# Altium PCB do_an.PcbDoc
Units mm, origin at the board's own origin, x right, y up, seen from the top; angles counter-clockwise.
Board outline 42.54 x 28.44 mm, 2 copper layers (Top Layer, Bottom Layer); 27 components, 14 nets, 69 pads, 0 vias.
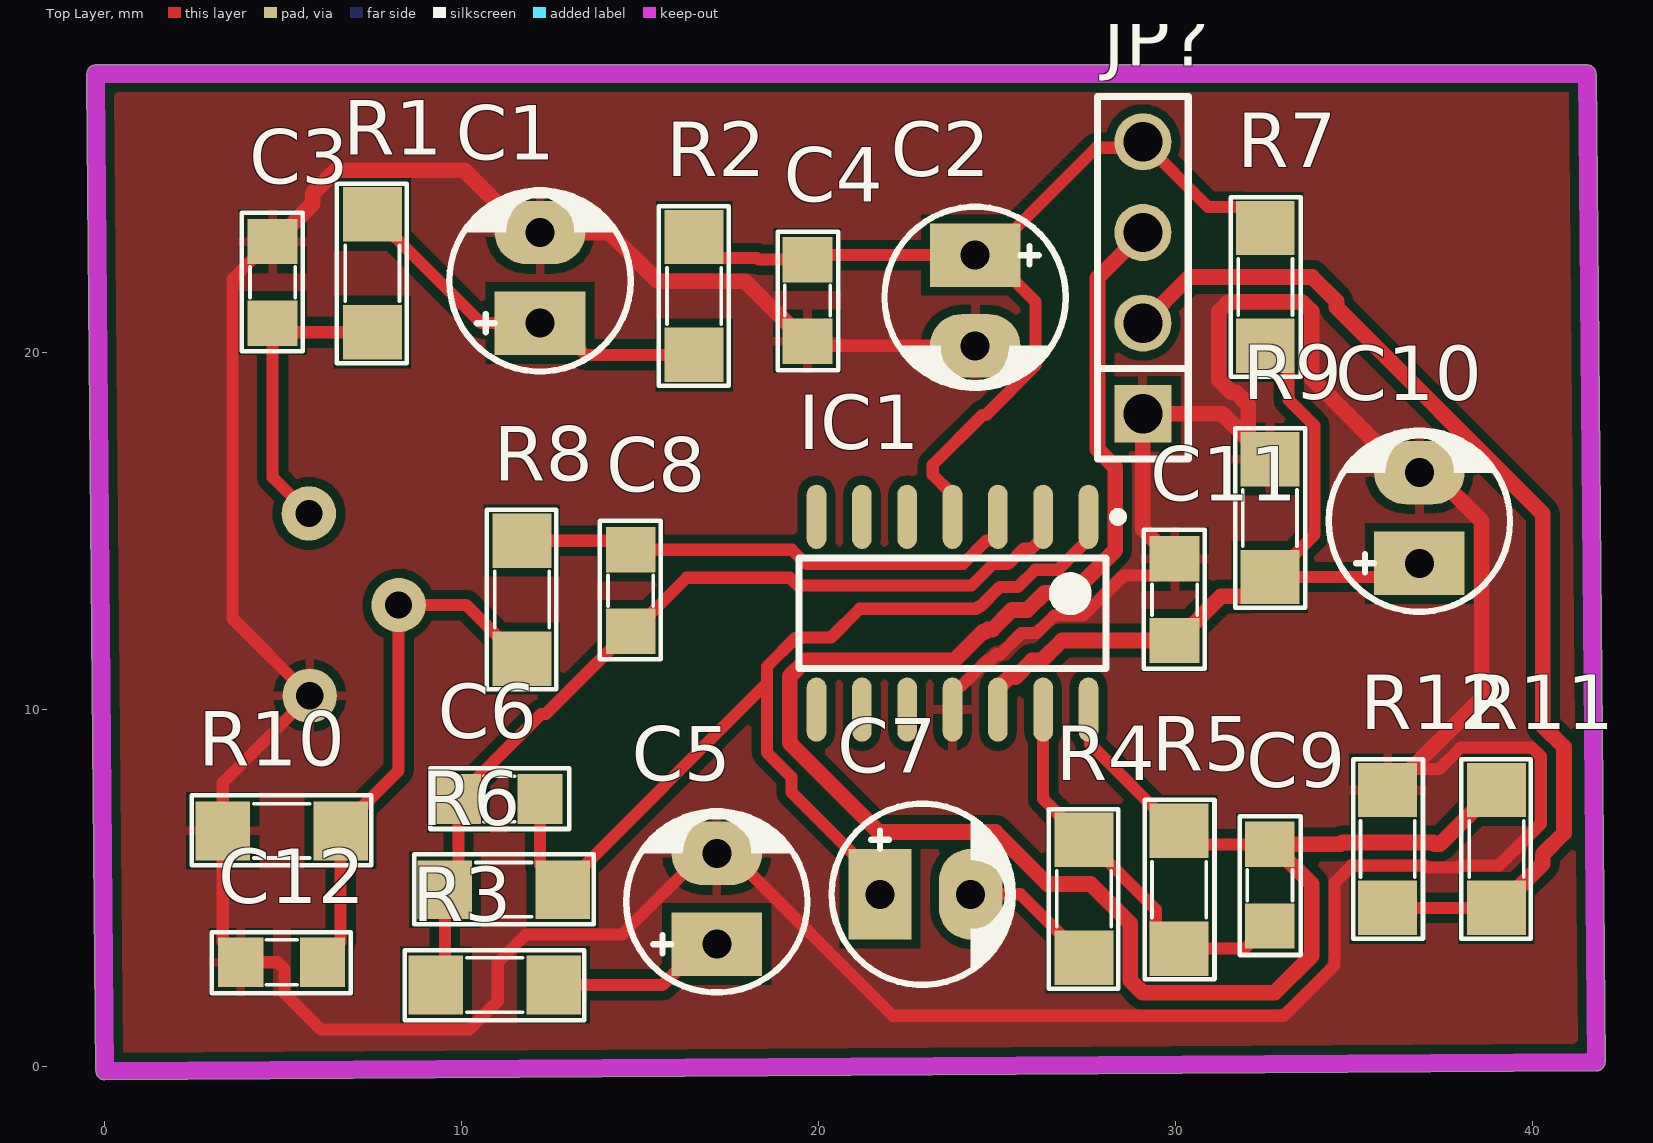
[diagram p0: Top Layer view]
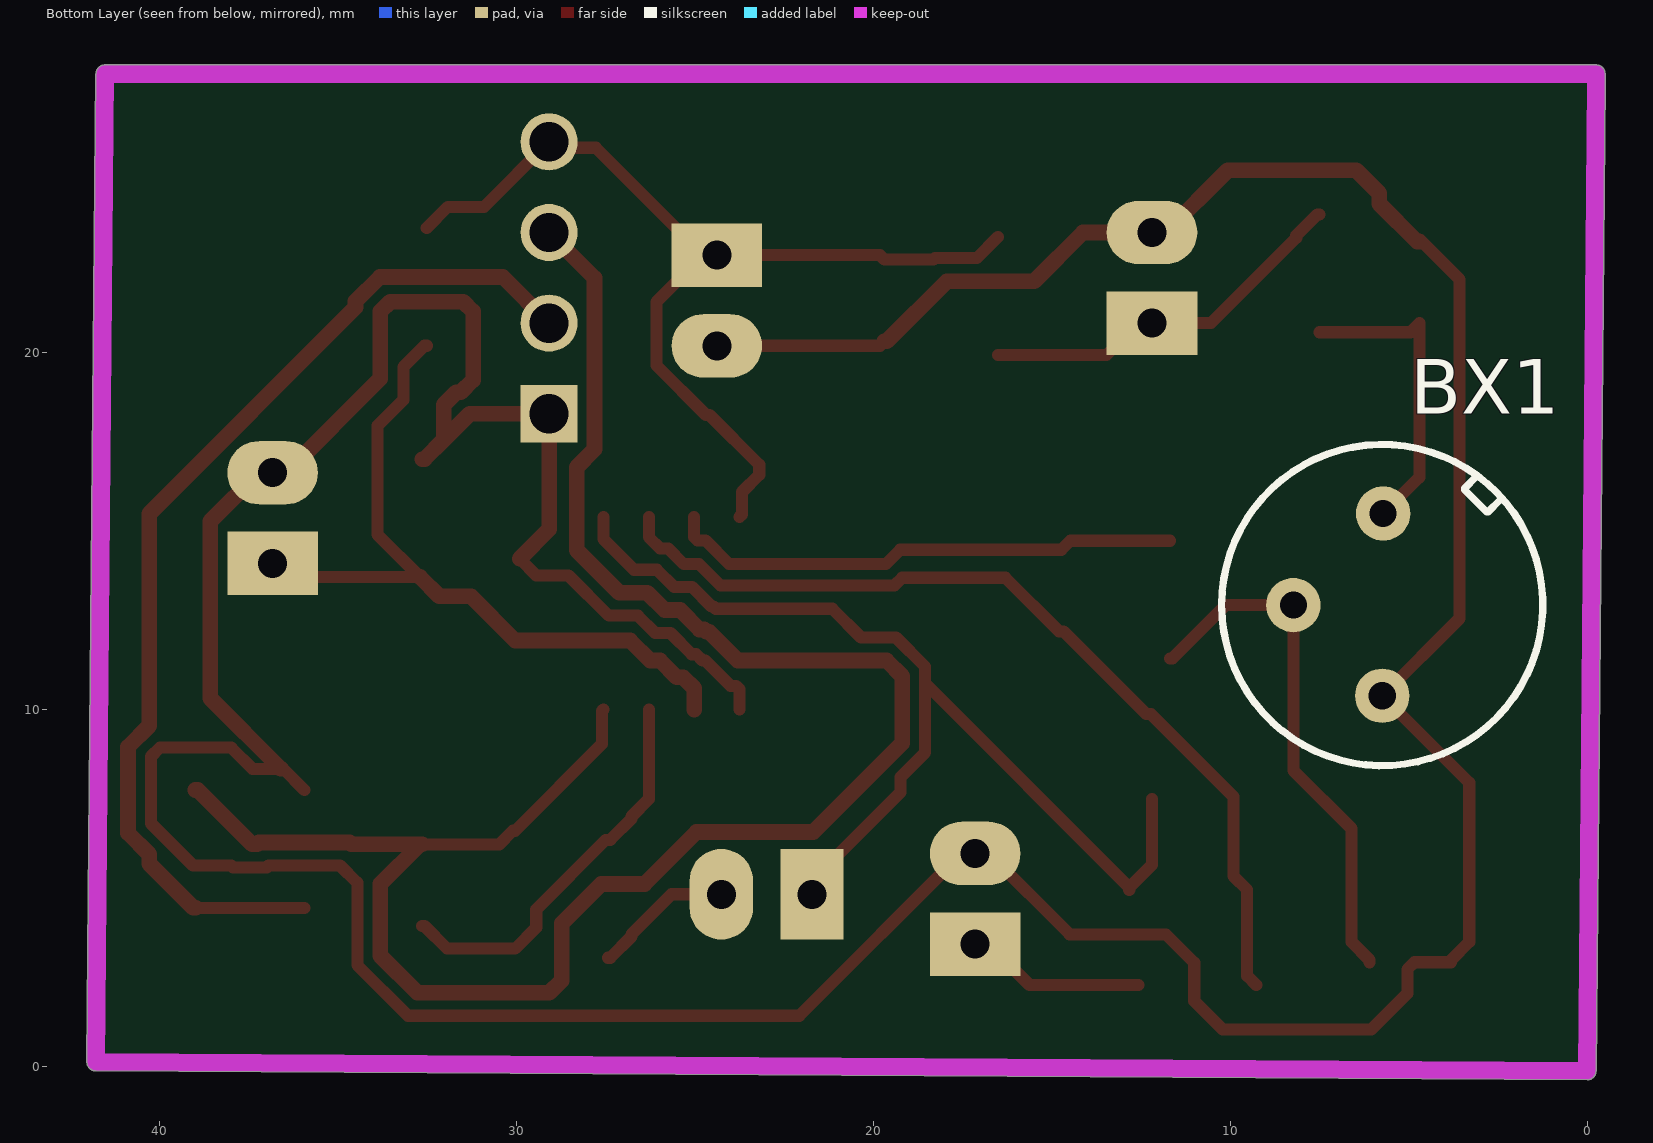
[diagram p1: Bottom Layer view, seen from below]
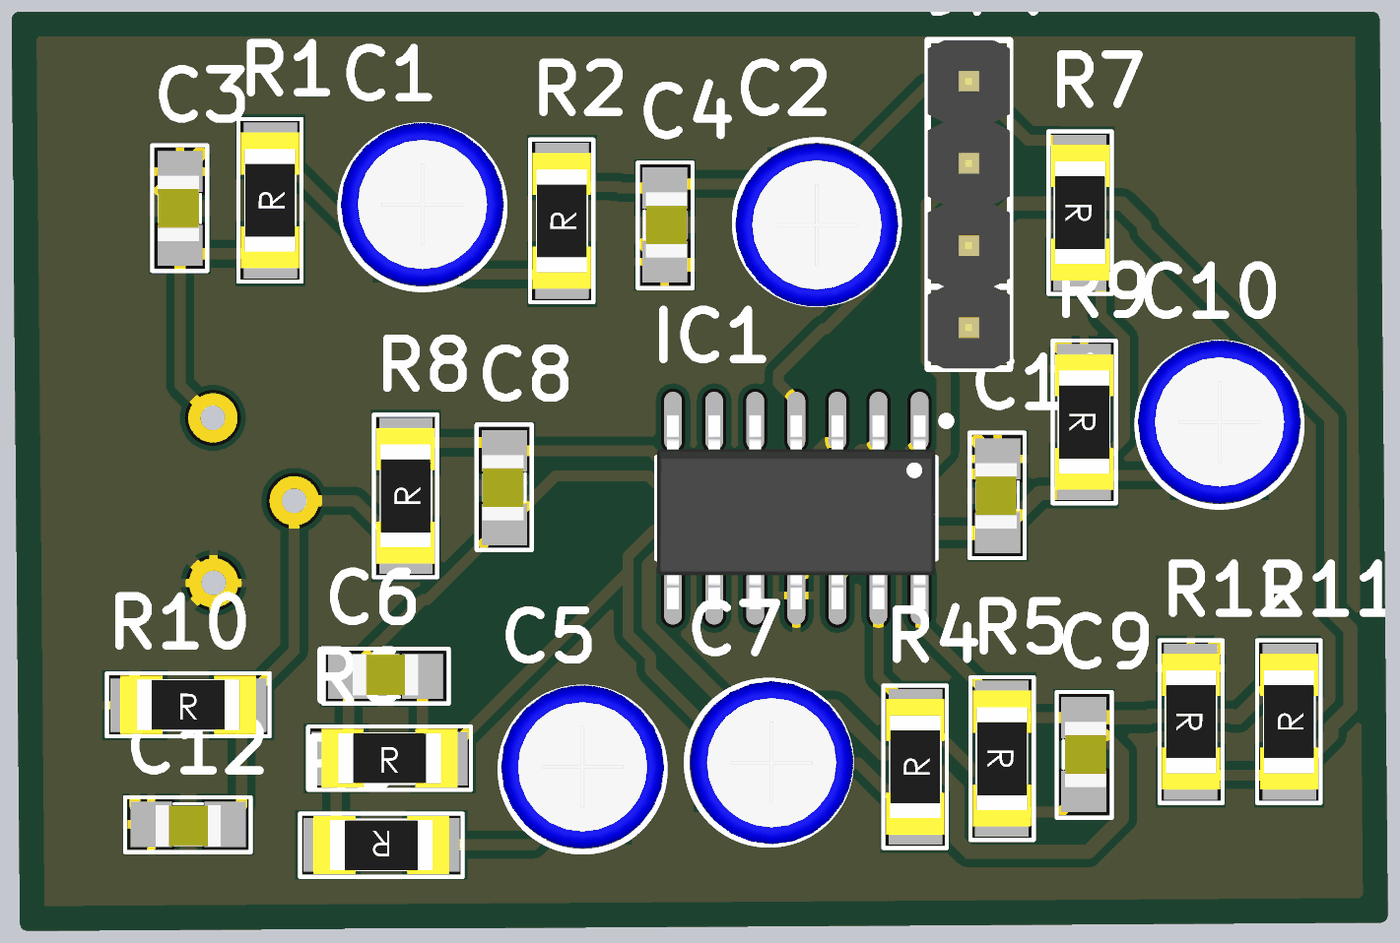
[diagram p2: 3D render of the assembled board from above, using the file's embedded part models]

## Layer stack, top to bottom
Top Solder: solder mask 0.0102, Solder Resist, Dk 3.5
Top Layer: signal copper 0.0356
Dielectric 1: dielectric 0.32, FR-4, Dk 4.8
Bottom Layer: signal copper 0.0356
Bottom Solder: solder mask 0.0102, Solder Resist, Dk 3.5

## Board outline
-0.504,27.559 -0.504,27.813 cw(c-0.254,27.813) -0.254,28.063 41.529,28.063 cw(c41.529,27.813) 41.779,27.815 42.033,0.129 42.033,0.127 cw(c41.783,0.127) 41.784,-0.123 0.002,-0.377 cw(c0,-0.127) -0.25,-0.129

## Design rules (kind name [scope] priority, off if disabled: settings)
Clearance [All] p1: gap=0.254 ignorepadtopadclearanceinfootprint=FALSE except(0: Arc-Hole Track-Hole SMDPad-Hole THPad-Hole Via-Hole Fill-Hole Poly-Hole Region-Hole Text-Hole)
PolygonConnect [All] p1: connectstyle=Relief reliefconductorwidth=0.254 reliefentries=4 polygonreliefangle="90 Angle" airgapwidth=0.254
RoutingVias [All] p1: holewidth=0.711 width=1.27 viastyle="Through Hole" minholewidth=0.711 minwidth=1.27 maxholewidth=0.711 maxwidth=1.27
SolderMaskExpansion [All] p1: expansion=0.102 istentingtop=FALSE
Width [All] p1: maxlimit=0.44 minlimit=0.254 preferedwidth=0.34
30 further rules are at their usual default settings.

## Components (designator, comment, footprint, x,y, rotation, side; value= is the part's Value field where it differs from the comment)
BX1 "PIR D203S" BXR315A 5.715,15.494 r270 bottom
C1 "100uF" CP1/2 12.192,20.828 r90 top value=10uF/50V
C2 "100uF" CP1/2 24.384,22.733 r270 top value=10uF/50V
C3 "104" SM-0805 4.699,21.971 r270 top value=103
C4 "104" SM-0805 19.685,21.463 r90 top value=103
C5 "47uF" CP1/2 17.145,3.429 r90 top value=10uF/50V
C6 "103" SM-0805 11.049,7.493 r180 top
C7 "10uF" CP1/2 21.717,4.826 r0 top value=10uF/50V
C8 "103" SM-0805 14.732,13.335 r270 top
C9 "103" SM-0805 32.639,5.08 r90 top
C10 "10uF" CP1/2 36.83,14.097 r90 top value=10uF/50V
C11 "103" SM-0805 29.972,13.081 r270 top
C12 "104" SM-0805 4.953,2.921 r0 top value=103
IC1 "LM324 SOP14" "sop 14" 23.749,12.7 r270 top
JP? "JP 1x4 2.54" "JP 1x4 DT" 29.083,18.288 r90 top
R1 "10K" SM-1206 7.493,22.225 r90 top value=1K
R2 "10K" SM-1206 16.51,21.59 r90 top value=1K
R3 "47K" SM-1206 10.922,2.286 r180 top value=1K
R4 "15K" SM-1206 27.432,4.699 r90 top value=1K
R5 "2.7M" SM-1206 30.099,4.953 r270 top value=1K
R6 "1M" SM-1206 11.176,4.953 r0 top value=1K
R7 "150k" SM-1206 32.512,21.844 r270 top value=1K
R8 "120K" SM-1206 11.684,13.081 r90 top value=1K
R9 "100K" SM-1206 32.639,15.367 r270 top value=1K
R10 "120k" SM-1206 4.953,6.604 r0 top value=1K
R11 "100K" SM-1206 38.989,6.096 r90 top value=1K
R12 "100K" SM-1206 35.941,6.096 r270 top value=1K

## Footprints (in the part's own frame and the unit in brackets; to place one, negate y for a bottom-side part, rotate by r counter-clockwise, add the part's x,y. Pads: shape width x height; smd on the part's side, far side on the other; paste and mask are expansions set on the pad)
BXR315A [mil] "Xtal for RF"
  round 60 hole 30: 1(0,0) 2(101,-99) 3(201,-1)
  silkscreen extent -76,-178 278,176
CP1/2 [mil] "Tu hoa < 22uF/16>50V"
  rect 70x100 hole 32: 1(0,0)
  oval 70x100 hole 32: 2(100,0)
  silkscreen extent -53,-100 146,100, body extent -49,-99 149,99, height 287
"JP 1x4 DT" [mm] "4 pins, 1 row, straight, gold plating"
  rect 1.6x1.6 hole 1.1: 1(0,0)
  round 1.6 hole 1.1: 2(2.54,0) 3(5.08,0) 4(7.62,0)
  silkscreen extent -1.27,-1.27 8.89,1.27, body extent -1.27,-1.27 8.89,1.27, height 8.54
SM-0805 [mil] "Compoment SMD 80x50mil"
  rect 50x55 smd: 1(-45,0) 2(45,0)
  silkscreen extent -77,-34 76,33, body extent -40,-27 40,23, height 24
SM-1206 [mil] "Compoment SMD 120x60mil"
  rect 60x65 smd: 1(-65,0) 2(65,0)
  silkscreen extent -99,-38 99,39, body extent -83,-35 83,36, height 25
"sop 14" [mm] "SOIC, 14-Leads, Body 8.60x3.90mm, Pitch 1.27mm, IPC Medium Density"
  oval 1.8x0.55 smd: 1(-2.7,3.81) 2(-2.7,2.54) 3(-2.7,1.27) 4(-2.7,0) 5(-2.7,-1.27) 6(-2.7,-2.54) 7(-2.7,-3.81) 8(2.7,-3.81) 9(2.7,-2.54) 10(2.7,-1.27) 11(2.7,0) 12(2.7,1.27) 13(2.7,2.54) 14(2.7,3.81)
  silkscreen extent -2.82,-4.3 1.55,4.76, body extent -2.87,-4.3 3.13,4.3, height 1.75

## Part data
C1 C2 C5 C7 C10: library part CP1, "Cap P  0,1uF < 22uF , 16 - 50V", Description 1="10 => 220uF/6,3V/10V - 10uF => 100uF/16V", Description 2="0,1uF => 33uF/50V - 10uF => 22uF/63V", Description 3="0,47uF => 10uF/100V"
C3 C4 C6 C8 C9 C11 C12: library part CM, "Cap SMD"
IC1: "Dán", Chung_Loai=Dán, Don_Vi=Con, Ma_Hang=MH002173, Ten_Linh_Kien="LM324 SOP14"
JP?: library part "JP 1x4 2.54 Duc Thang", "Cắm", Chung_Loai=Cắm, Don_Vi=Con, Ma_Hang=MH000903, Ten_Linh_Kien="Jump Đơn Đực 2.54MM 1x40P Thẳng 11MM"
R1 R2 R3 R4 R5 R6 R7 R8 R9 R10 R11 R12: library part RM, "Resistor SMD"

## Nets (pads, with @x,y where several pads share a name; then routed paths per layer and width w, separated by ;. In a path a pad name is that pad's centre, name@x,y a point inside that pad or via, vN(x,y) a via of type N, cw(c..) or ccw(c..) an arc to the next point about the centre after c; other vN are vias at no path point)
+5: C2.1 C4.2 IC1.4 JP?.4 R2.2 R7.1 | length 28.8
  Top Layer w0.34: R2.2 17.102,22.649 18.267,22.649 18.31,22.606 C4.2 19.812,22.733 C2.1@24.003,22.733 ; IC1.4 23.68,15.469 23.68,16.094 23.194,16.58 23.194,16.862 24.588,18.255 24.684,18.255 26.078,19.649 26.078,21.42 C2.1@24.765,22.733 ; R7.1 31.92,24.087 30.904,24.087 JP?.4 28.916,25.741 27.773,25.741 C2.1@24.765,22.733 ; C2.1@24.003,22.733 C2.1@24.765,22.733 ; C2.1@24.003,22.733 C2.1 C2.1@24.765,22.733
GND: BX1.3 C1.2 C2.2 C3.1 C4.1 C5.2 C10.2 C11.1 C12.1 IC1.11 JP?.1 R9.1 R10.1 R12.1 | length 137.7
  Top Layer w0.34: C3.1 4.635,23.114 3.577,22.055 3.577,12.552 BX1.3 3.302,7.95 R10.1 3.302,3.492 3.81,2.984 C12.1 4.838,2.921 5.037,2.722 5.037,2.047 6.047,1.037 10.209,1.037 11.006,1.834 11.006,2.906 11.803,3.704 14.499,3.704 16.764,5.969 C5.2 17.526,5.969 22.073,1.422 33.039,1.422 34.455,2.839 34.455,5.147 34.94,5.631 36.942,5.631 36.994,5.579 37.936,5.579 37.988,5.631 39.06,5.631 40.238,6.809 40.238,8.685 39.99,8.933 37.988,8.933 37.394,8.339 36.597,8.339 36.533,8.339 R12.1 ; C4.1 19.812,20.193 C2.2 ; IC1.11 23.749,10.568 23.846,10.665 24,10.665 24.709,11.374 24.787,11.374 24.963,11.55 25.085,11.55 25.679,12.144 26.109,12.144 26.597,12.632 27.41,12.632 28.537,13.759 29.443,13.759 C11.1@29.909,14.224
  Top Layer w0.44: C3.1 4.763,23.114 5.824,24.176 5.824,24.465 6.471,25.112 10.067,25.112 11.811,23.368 C1.2 14.125,23.368 15.488,22.005 17.936,22.005 19.621,20.32 C4.1 ; C11.1@29.909,14.224 29.083,15.05 JP?.1 31.305,18.288 R9.1@32.033,17.56 ; R9.1 32.575,17.018 R9.1@32.033,17.56 ; R12.1@36.597,8.339 38.574,10.316 38.574,15.274 37.211,16.637 C10.2 36.449,16.637 33.811,19.275 33.811,21.151 33.534,21.429 31.49,21.429 31.213,21.151 31.213,19.235 31.559,18.888 31.687,18.888 32.033,18.541 R9.1@32.033,17.56
NetBX1_1: BX1.1 C3.2 R1.1 | length 8.7
  Top Layer w0.34: BX1.1 4.699,16.51 C3.2 4.953,20.574 R1.1
NetBX1_2: BX1.2 C12.2 R8.1 R10.2 | length 15
  Top Layer w0.34: C12.2 6.096,2.984 6.604,3.492 R10.2 6.604,6.667 8.23,8.293 BX1.2 10.122,12.929 11.62,11.43 R8.1
NetC1_1: C1.1 R1.2 R2.1 | length 10.7
  Top Layer w0.34: R1.2 7.556,23.876 8.149,23.284 8.149,23.22 10.541,20.828 C1.1 12.573,20.828 13.462,19.939 R2.1
NetC5_1: C5.1 R3.1 | length 5
  Top Layer w0.34: R3.1 15.621,2.286 16.764,3.429 C5.1
NetC6_1: C6.1 C7.1 IC1.1 R6.2 | length 29.7
  Top Layer w0.34: C6.1 12.192,5.651 R6.2@12.827,5.016 ; R6.2 R6.2@12.827,5.016 ; C7.1 21.717,5.207 19.24,7.684 19.24,8.104 18.546,8.798 18.546,10.736 ; IC1.1 27.559,14.775 26.704,13.92 26.063,13.92 25.575,13.432 25.075,13.432 24.531,12.888 24.479,12.888 24.416,12.825 21.15,12.825 20.343,12.018 19.362,12.018 18.546,11.202 18.546,10.736 ; R6.2@12.827,5.016 18.546,10.736
NetC6_2: C6.2 C8.2 IC1.2 R3.2 R6.1 | length 25.7
  Top Layer w0.34: R3.2 9.525,2.54 R6.1 9.906,5.334 C6.2 9.906,7.556 12.224,9.874 12.351,9.874 14.668,12.192 C8.2 14.795,12.192 16.299,13.696 19.19,13.696 19.403,13.482 24.285,13.482 24.879,14.076 25.309,14.076 25.747,14.514 25.971,14.514 26.289,14.832 IC1.2
NetC7_2: C7.2 R4.1 | length 3.9
  Top Layer w0.34: C7.2 25.654,4.826 26.776,3.704 26.776,3.64 27.368,3.048 R4.1
NetC8_1: C8.1 IC1.3 R8.2 | length 14.5
  Top Layer w0.34: R8.2 14.478,14.732 C8.1 19.247,14.478 19.649,14.076 24.039,14.076 24.697,14.735 24.922,14.735 25.019,14.832 IC1.3
NetC9_1: C9.1 IC1.13 R4.2 R5.2 | length 11.2
  Top Layer w0.34: IC1.13 26.289,7.493 26.776,7.006 26.776,6.942 27.368,6.35 R4.2 27.495,6.35 29.443,4.402 29.443,3.894 30.035,3.302 R5.2 31.941,3.302 32.575,3.937 C9.1
NetC10_1: C10.1 C11.2 IC1.12 R7.2 R9.2 | length 21.4
  Top Layer w0.34: R7.2 32.575,20.193 33.168,19.601 33.168,18.677 33.888,17.956 33.888,14.902 32.703,13.716 36.449,13.716 C10.1
  Top Layer w0.44: IC1.12 25.019,10.595 25.33,10.906 25.511,10.906 25.979,11.374 26.25,11.374 26.814,11.938 C11.2 30.035,11.938 31.271,13.174 32.16,13.174 R9.2@32.703,13.716
OUTPUT: JP?.2 R11.1 R12.2 | length 29.7
  Top Layer w0.34: R12.2 R11.1
  Top Layer w0.44: JP?.2 30.378,22.123 33.821,22.123 34.505,21.439 34.505,21.27 40.288,15.487 40.288,9.545 40.882,8.951 40.882,6.543 40.288,5.949 40.288,5.681 39.052,4.445 R11.1
OUTPUT1: C9.2 IC1.14 JP?.3 R5.1 R11.2 | length 58.8
  Top Layer w0.34: IC1.14 27.599,9.96 27.599,9.04 30.035,6.604 R5.1 30.48,6.223 C9.2
  Top Layer w0.44: JP?.3 27.809,22.094 27.809,17.292 28.308,16.793 28.308,14.465 27.119,13.276 26.33,13.276 25.842,12.788 25.412,12.788 24.868,12.244 24.746,12.244 24.682,12.181 24.605,12.181 23.798,11.374 20.61,11.374 19.629,11.374 19.19,10.935 19.19,9.065 21.685,6.57 24.954,6.57 26.41,5.114 27.624,5.114 28.731,4.006 28.731,2.412 29.077,2.066 32.772,2.066 33.811,3.106 33.811,5.114 C9.2@32.703,6.223 ; C9.2 C9.2@32.703,6.223 ; R11.2 38.925,7.747 37.401,6.223 37.261,6.223 37.209,6.275 34.673,6.275 34.621,6.223 C9.2@32.703,6.223
pads on no net: IC1.5 IC1.6 IC1.7 IC1.8 IC1.9 IC1.10

## Polygon pours and split planes (outlines as drawn)
GND on Top Layer "GND_L01_P000" (solid, remove dead copper, pour order 0): -0.254,27.94 ccw(c0.053,28.247) 0.053,27.813 41.656,27.813 41.656,0.254 cw(c41.043,0.867) 41.043,0 0,0

## Keep-outs
Keep-Out Layer:
  lines w0.5: -0.254,27.559 -0.254,27.813 0.381,27.813 41.529,27.813 41.783,0.127 0,-0.127 -0.254,27.559